# Altium PCB RELAY_MODULE.PcbDoc
Units mil, origin at the board's own origin, x right, y up, seen from the top; angles counter-clockwise.
Board outline 1450 x 1065 mil, 2 copper layers (Top Layer, Bottom Layer); 14 components, 10 nets, 29 pads, 0 vias.
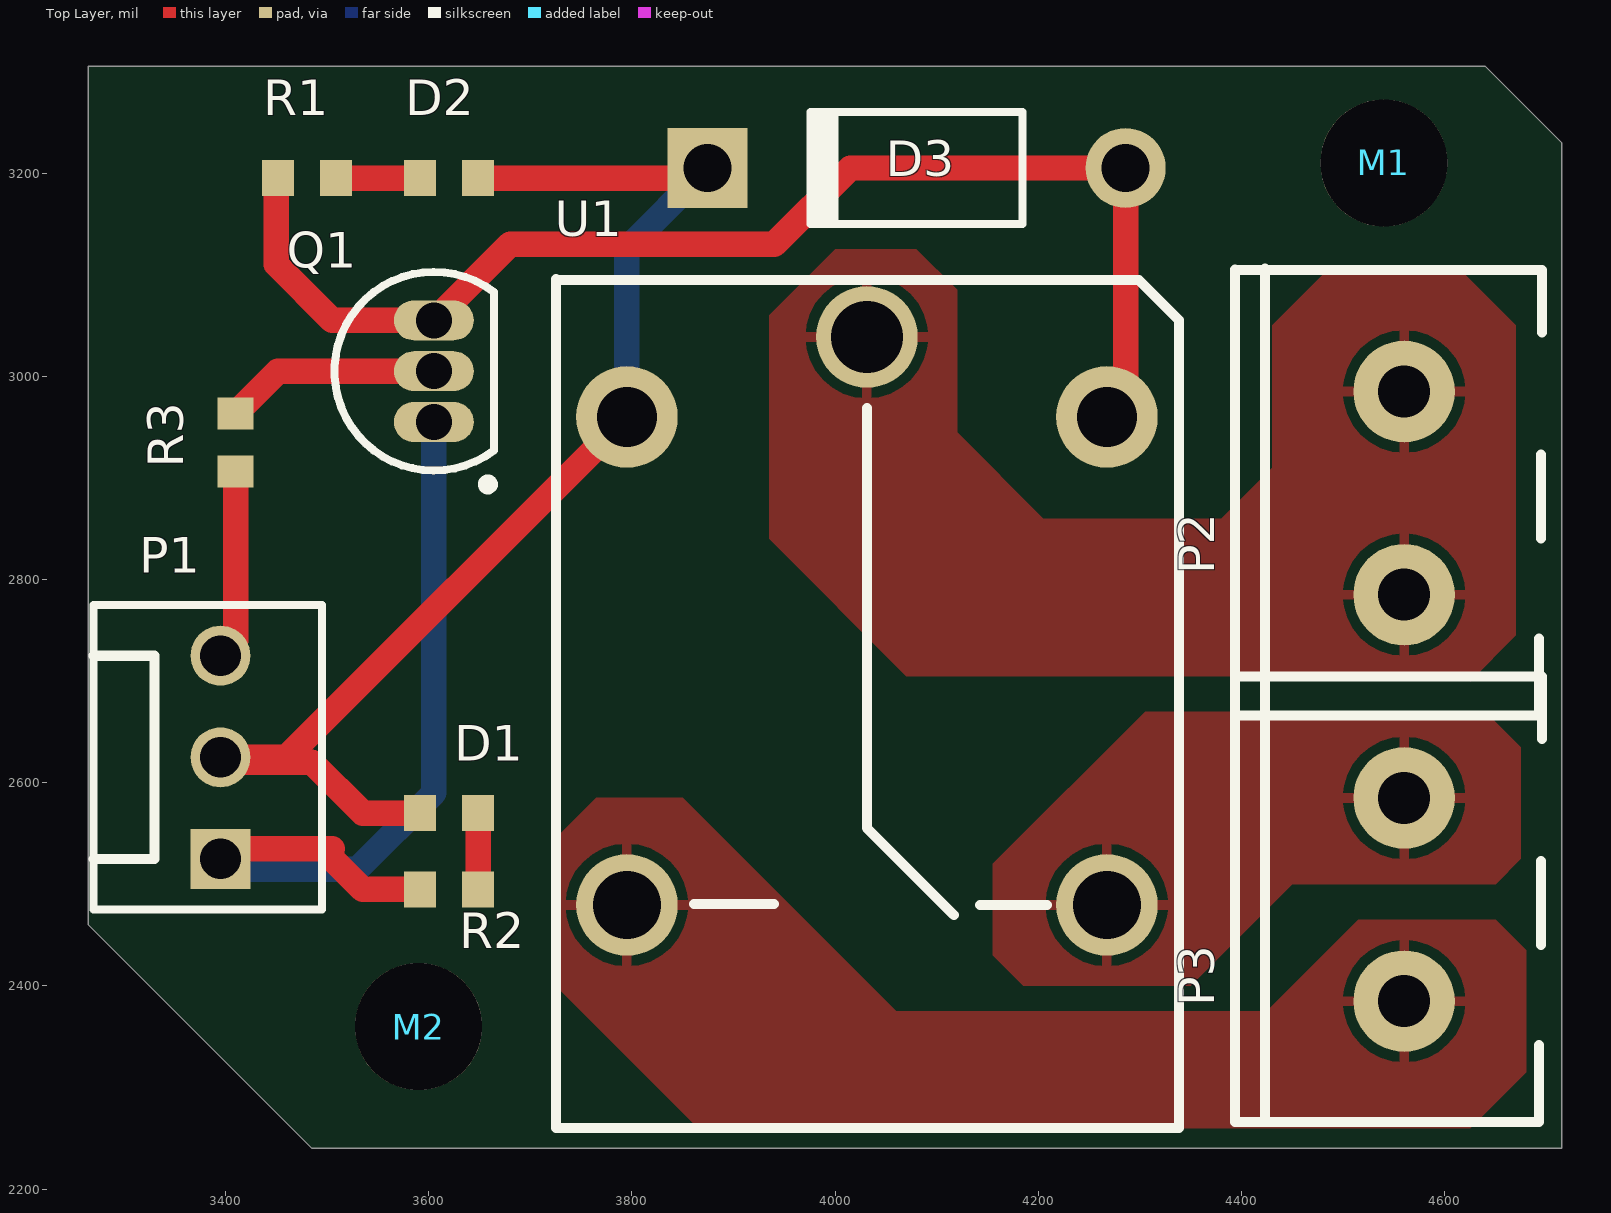
[diagram p0: Top Layer view]
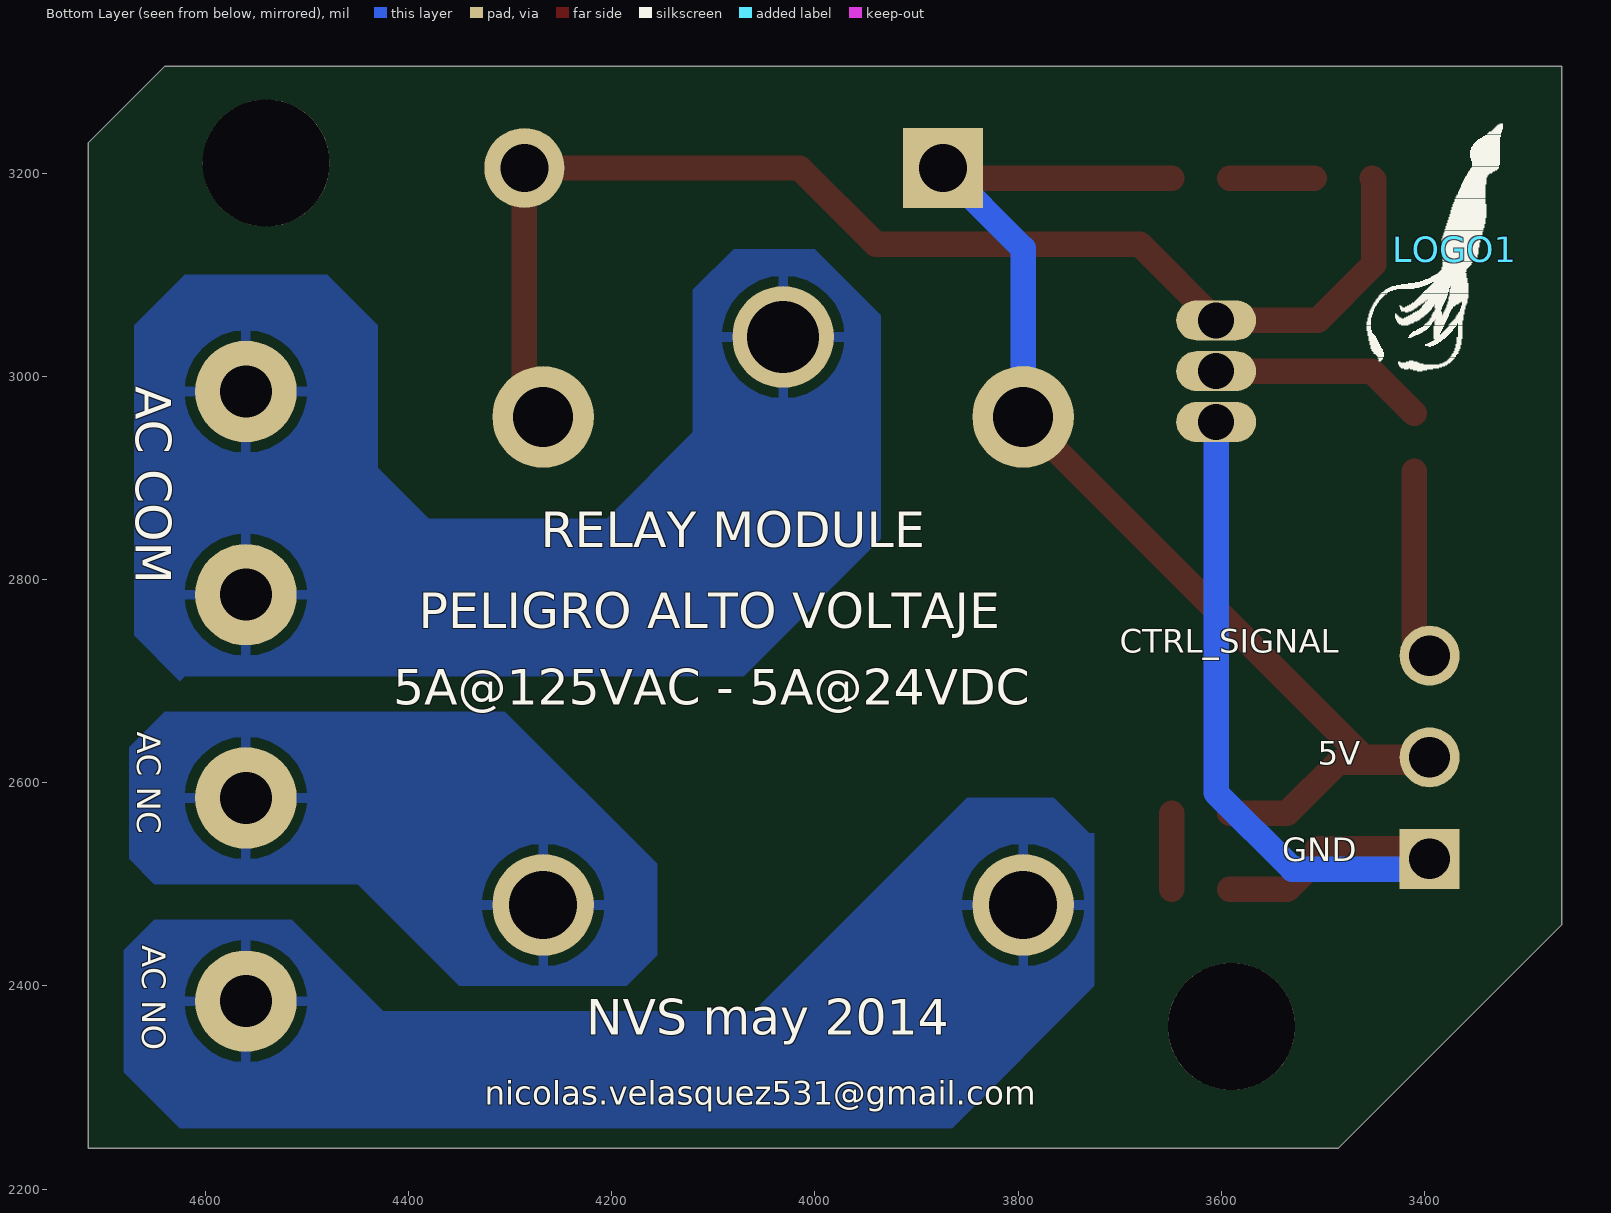
[diagram p1: Bottom Layer view, seen from below]

## Layer stack, top to bottom
Top Layer: signal copper 1.4
Dielectric: dielectric 12.6, FR-4, Dk 4.8
Bottom Layer: signal copper 1.4

## Board outline
3265,2460 3485,2240 4715,2240 4715,3230 4640,3305 3265,3305

## Design rules (kind name [scope] priority, off if disabled: settings)
Clearance [All] p1: gap=10
PolygonConnect [All] p1: connectstyle=Relief reliefconductorwidth=10 reliefentries=4 polygonreliefangle="90 Angle" airgapwidth=10
RoutingVias [All] p1: holewidth=28 width=50 viastyle="Through Hole" minholewidth=28 minwidth=50 maxholewidth=28 maxwidth=50
SolderMaskExpansion [All] p1: expansion=4
Width [All] p1: maxlimit=25 minlimit=10 preferedwidth=15
28 further rules are at their usual default settings.

## Components (designator, comment, footprint, x,y, rotation, side; value= is the part's Value field where it differs from the comment)
D1 "RED" R0603_L 3620,2570 r0 top
D2 "Green" R0603_L 3620,3195 r180 top
D3 "Diode 1N4001" DO-41 4080,3205 r180 top
LOGO1 "Logo_DeepSea" DeepSea_logo1 3370,3125 r180 bottom
M1 "MountingHole-1/8in" MoutingHole-1/8in 4540,3210 r0 top
M2 "MountingHole-1/8in" MoutingHole-1/8in 3590,2360 r0 top
P1 "Conn x 3" "conn x 3" 3395,2525 r90 top
P2 "BLOCK_CONNx2" BLOCK_CONNX2 4560,2985 r90 top
P3 "BLOCK_CONNx2" BLOCK_CONNX2 4560,2585 r90 top
Q1 "2N3904" TO-92A 3605,3005 r0 top
R1 "R_SMD" R0603_L 3480,3195 r0 top
R2 "R_SMD" R0603_L 3620,2495 r180 top
R3 "R_SMD" R0603_L 3410,2935 r270 top
U1 "RELAY SPDT 5A 5V" RELAY 3795,2960 r270 top

## Footprints (in the part's own frame and the unit in brackets; to place one, negate y for a bottom-side part, rotate by r counter-clockwise, add the part's x,y. Pads: shape width x height; smd on the part's side, far side on the other; paste and mask are expansions set on the pad)
BLOCK_CONNX2 [mm]
  round 2.54 hole 1.3: 1(-5.08,0) 2(0,0)
  silkscreen extent -8.1,-3.45 3.08,4.23, body extent -8.1,-3.45 3.05,4.23, height 10
"conn x 3" [mm]
  rect 1.5x1.5 hole 1.016: 1(0,0)
  round 1.5 hole 1.016: 2(2.54,0) 3(5.08,0)
  silkscreen extent -1.27,-2.54 6.35,3.18
DeepSea_logo1 [mil]
  silkscreen extent -87,-120 47,123
DO-41 [mm] "Diode, Axial; Body 5.2 x 2.7 mm (LxDia. max), Lead Dia. 0.86 mm (max)"
  round 2 hole 1.2: 1(-5.23,0)
  rect 2x2 hole 1.2: 2(5.23,0)
  silkscreen extent -2.65,-1.4 2.75,1.4
MoutingHole-1/8in [mil]
  round 125 hole 125: 0(0,0)
R0603_L [mm] "Chip Resistor, 2-Leads, Body 1,60x0,85mm, IPC High Density"
  rect 0.8x0.9 smd: 1(-0.725,0) 2(0.725,0)
  body extent -0.87,-0.48 0.87,0.48, height 0.45
RELAY [mm]
  round 2.54 hole 1.8: 1(-2,6)
  round 2.54 hole 1.5: 2(0,0) 5(0,12)
  round 2.54 hole 1.7: 3(12.2,0) 4(12.2,12)
  silkscreen extent -3.45,-1.78 17.77,13.8, body extent -3.4,-1.8 17.8,13.8, height 15.6
TO-92A [mm] "TO, Flat Index; 3 In-Line, Axial Leads; Body Dia. 4.5mm; Leads 0.51 x 0.48 mm (max)"
  oval 2x1 hole 0.9: 1(0,-1.27) 2(0,0) 3(0,1.27)
  silkscreen extent -2.48,-2.95 1.5,2.48, body extent -2.5,-2.5 1.5,2.5, height 6.86

## Part data
D1 D2: library part LED_SMD
D3: "1 Amp General Purpose Rectifier"
P1: "CONN HEADER VERT 3POS .100 TIN"
P2 P3: "TERM BLOCK 5.08MM VERT 2POS PCB"
Q1: "NPN General Purpose Amplifier"
U1: "RELAY GENERAL PURPOSE SPDT 5A 5V"

## Nets (pads, with @x,y where several pads share a name; then routed paths per layer and width w, separated by ;. In a path a pad name is that pad's centre, name@x,y a point inside that pad or via, vN(x,y) a via of type N, cw(c..) or ccw(c..) an arc to the next point about the centre after c; other vN are vias at no path point)
5V: D1.1 D2.1 D3.2 P1.2 U1.2 | length 1265.5
  Top Layer w25: D1.1 3535,2570 3485,2620 3400,2620 P1.2 3460,2625 U1.2 ; D2.1 3864.09,3195 D3.2
  Bottom Layer w25: U1.2 3795,3125.91 D3.2
AC_COM: P2.1 P2.2 U1.1
AC_NC: P3.2 U1.4
AC_NO: P3.1 U1.3
CTRL_SIGNAL: P1.3 R3.2 | length 187.7
  Top Layer w25: P1.3 3410,2740 R3.2
GND: P1.1 Q1.1 R2.2 | length 819.1
  Top Layer w25: P1.1@3395,2535 3505,2535 ; 3505,2525 3535,2495 R2.2
  Bottom Layer w25: P1.1 3405,2515 3530,2515 3605,2590 Q1.1
NetD1_2: D1.2 R2.1 | length 75
  Top Layer w25: R2.1 D1.2
NetD2_2: D2.2 R1.2 | length 82.9
  Top Layer w25: R1.2 D2.2
NetD3_1: D3.1 Q1.3 R1.1 U1.5 | length 1259.1
  Top Layer w25: R1.1 3450,3193.54 3450,3110 3505,3055 Q1.3 3680,3130 3940,3130 4015,3205 D3.1 4285.91,2978.46 U1.5
NetQ1_2: Q1.2 R3.1 | length 212.2
  Top Layer w25: R3.1 3451.46,3005 Q1.2
pads on no net: M1.0 M2.0

## Polygon pours and split planes (outlines as drawn)
AC_NC on Top Layer "Top Layer-No Net" (solid, remove dead copper, pour order 12): 4365,2670 4640,2670 4675,2635 4675,2525 4650,2500 4450,2500 4375,2425 4350,2400 4185,2400 4155,2430 4155,2520 4305,2670 4360,2670
AC_COM on Top Layer "Top Layer-No Net" (solid, remove dead copper, pour order 10): 3935,3060 4000,3125 4065,3125 4080,3125 4120,3085 4120,2945 4205,2860 4380,2860 4430,2910 4430,3050 4480,3100 4620,3100 4670,3050 4670,2745 4625,2700 4620,2705 4490,2705 4070,2705 3935,2840 3935,3060
AC_NO on Top Layer "Top Layer-No Net" (solid, remove dead copper, pour order 8): 4515,2465 4650,2465 4680,2435 4680,2315 4625,2260 3865,2260 3725,2400 3725,2550 3730,2550 3765,2585 3850,2585 3905,2530 4060,2375 4370,2375 4425,2375 4515,2465
AC_NO on Bottom Layer "Top Layer-No Net" (solid, remove dead copper, pour order 7): 4515,2465 4650,2465 4680,2435 4680,2315 4625,2260 3865,2260 3725,2400 3725,2550 3730,2550 3765,2585 3850,2585 3905,2530 4060,2375 4370,2375 4425,2375 4515,2465
AC_NC on Bottom Layer "Top Layer-No Net" (solid, remove dead copper, pour order 11): 4365,2670 4640,2670 4675,2635 4675,2525 4650,2500 4450,2500 4375,2425 4350,2400 4185,2400 4155,2430 4155,2520 4305,2670 4360,2670
AC_COM on Bottom Layer "Top Layer-No Net" (solid, remove dead copper, pour order 9): 3935,3060 4000,3125 4065,3125 4080,3125 4120,3085 4120,2945 4205,2860 4380,2860 4430,2910 4430,3050 4480,3100 4620,3100 4670,3050 4670,2745 4625,2700 4620,2705 4490,2705 4070,2705 3935,2840 3935,3060

## Silkscreen, mask and mechanical layers (free items; w line width, h text height)
Bottom Overlay:
  text "AC COM" at 4680,2990 h60 r90
  text "RELAY MODULE" at 4270,2820 h60
  text "PELIGRO ALTO VOLTAJE" at 4390,2740 h60
  text "CTRL_SIGNAL" at 3700,2720 h40
  text "5A@125VAC - 5A@24VDC" at 4415,2665 h60
  text "AC NC" at 4675,2650 h40 r90
  text "5V" at 3505,2610 h40
  text "GND" at 3540,2515 h40
  text "AC NO" at 4670,2440 h40 r90
  text "NVS may 2014" at 4225,2340 h60
  text "nicolas.velasquez531@gmail.com" at 4325,2275 h40
Mechanical 1:
  the board outline again, w10